# EAGLE board Hello (EAGLE 8.5.0)
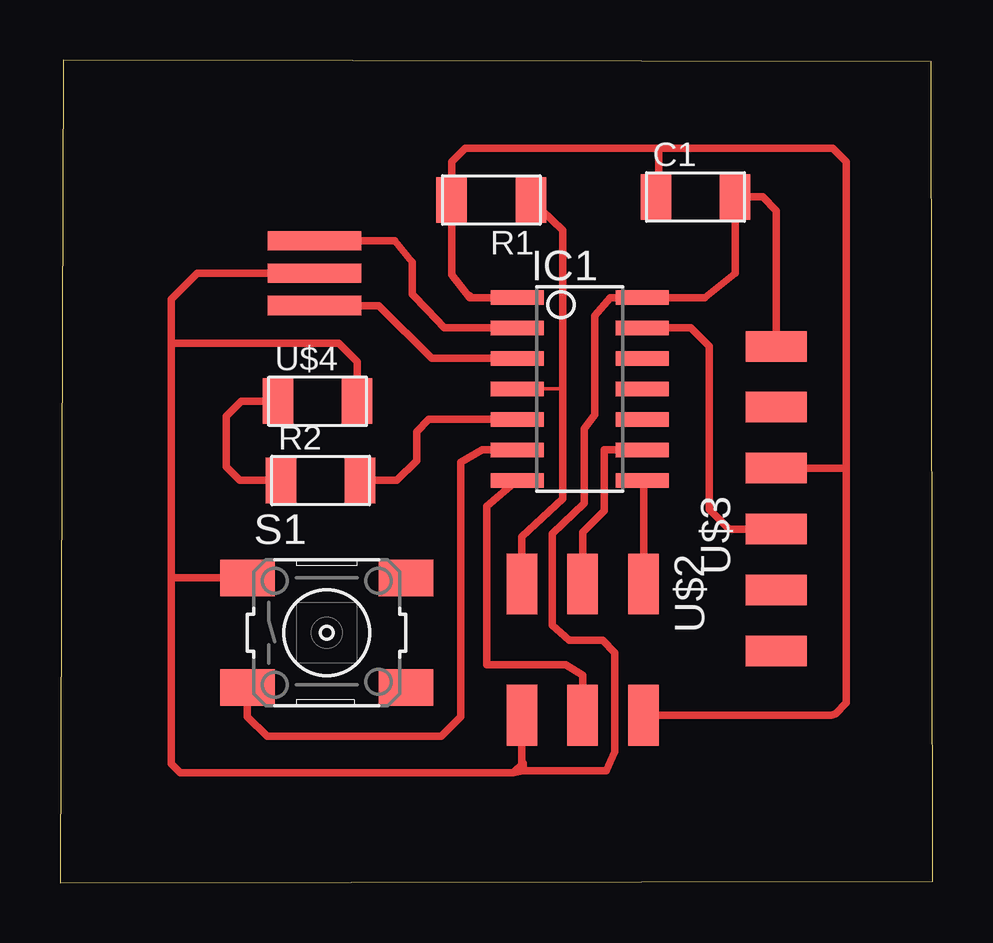
[diagram p0: board, top side]

Size 36.37 x 34.28 mm. Coordinates in mm from the lower left corner, seen from the top.
Outline: 0,0 36.37,0.06 36.31,34.22 0.13,34.28 0,0
Copper layers (1*16): Top 0.035mm / dielectric 1.5mm / Bottom 0.035mm
Design rules "default": minimum track width 6mil, minimum drill 0.35mm, track to track 6mil, track to pad 6mil, pad to pad 6mil, via to via 6mil, smd to smd 6mil, copper to edge 40mil, drill to drill 6mil, minimum pad ring 10mil, minimum via ring 8mil, stop-mask expansion 4mil, vias tented up to drill 0mil, thermal gap 10mil
Net classes: 0 default: clearance 0.205 mm

## Footprints (pad centres in the part's own frame; a part is rotated, then mirrored left to right if it is on the bottom)
C1206FAB = smd 1.27 x 1.905: 1 -1.651,0; 2 1.651,0
SOIC14 = smd 0.61 x 2.21: 1 -3.81,-2.603; 2 -2.54,-2.603; 3 -1.27,-2.603; 4 0,-2.603; 5 1.27,-2.603; 6 2.54,-2.603; 7 3.81,-2.603; 8 3.81,2.603; 9 2.54,2.603; 10 1.27,2.603; 11 0,2.603; 12 -1.27,2.603; 13 -2.54,2.603; 14 -3.81,2.603
R1206FAB = smd 1.27 x 1.905: 1 -1.651,0; 2 1.651,0
6MM_SWITCH = smd 2.286 x 1.524: 1 -3.302,2.286; 2 3.302,2.286; 3 -3.302,-2.286; 4 3.302,-2.286
EFOBM = smd 0.8 x 3.9: 1 -1.35,0; 2 0,0; 3 1.35,0
2X03SMD = smd 2.54 x 1.27: 1 -2.54,2.54; 2 2.92,2.54; 3 -2.54,0; 4 2.92,0; 5 -2.54,-2.54; 6 2.92,-2.54
1X06SMD = smd 2.54 x 1.27: 1 0,6.35; 2 0,3.81; 3 0,1.27; 4 0,-1.27; 5 0,-3.81; 6 0,-6.35
LED1206FAB = smd 1.27 x 1.905: 1 -1.651,0; 2 1.651,0

## Placement (x,y rotation side)
C1  CAP-US1206FAB  [C1206FAB]  26.48,28.57 0 top
IC1  ATTINY44-SSU  [SOIC14]  21.65,20.57 270 top
R1  [R1206FAB]  17.97,28.45 180 top
R2  [R1206FAB]  10.86,16.76 0 top
S1  [6MM_SWITCH]  11.11,10.41 0 top
U$1  RESONATOR  [EFOBM]  10.6,25.4 270 top
U$2  AVRISPSMD  [2X03SMD]  21.78,9.91 270 top
U$3  FTDI-SMD-HEADER  [1X06SMD]  29.84,16 0 top
U$4  LEDFAB1206  [LED1206FAB]  10.73,20.07 0 top

## Library data of the parts
C1 IC1 R1 R2 S1 U$1-U$4 = fab

## Nets
GND: C1.2 IC1.14 S1.1 U$1.2 U$2.6 U$3.1 U$4.2
MISO: IC1.8 U$2.1
MOSI: IC1.7 U$2.4
N$1: IC1.2 U$1.1
N$2: IC1.3 U$1.3
N$3: R2.1 U$4.1
N$4: IC1.6 S1.3
N$5: IC1.5 R2.2
N$7: U$3.5
PA0: IC1.13 U$3.4
PA1: IC1.12
RST: IC1.4 R1.1 U$2.5
SCK: IC1.9 U$2.3
VCC: C1.1 IC1.1 R1.2 U$2.2 U$3.3

## Tracks (layer width: path | path; a pad name or v marks a point on that pad's centre or on a via)
GND
  Top 0.305: U$3.1 29.84,28 29.27,28.57 C1.2 28.13,25.4 26.86,24.38 IC1.14 22.92,24.38 22.29,23.62 22.29,19.49 21.84,18.92 21.84,15.81 20.51,14.54 20.51,10.73 21.21,10.1 22.61,10.1 23.11,9.59 23.11,5.46 22.76,4.66 19.3,4.66 | U$2.6 19.24,4.92 19.3,4.66 | U$1.2 5.71,25.4 4.64,24.32 4.64,22.48 | 4.64,22.48 4.64,12.7 | 4.64,12.7 4.64,4.95 4.94,4.64 5.02,4.58 18.88,4.58 | 18.88,4.58 19.3,4.66 | S1.1 4.64,12.7 | U$4.2 12.38,21.72 11.62,22.48 4.64,22.48 | 19.3,4.66 19.3,4.98 18.88,4.58
MISO
  Top 0.305: U$2.1 24.32,16.7 IC1.8
MOSI
  Top 0.305: U$2.4 21.78,8.64 21.08,9.08 17.78,9.08 17.78,15.68 IC1.7
N$1
  Top 0.305: U$1.1 13.95,26.75 14.67,25.84 14.67,24.51 15.3,23.88 16,23.11 IC1.2
N$2
  Top 0.305: U$1.3 13.29,24.05 15.49,21.84 IC1.3
N$3
  Top 0.305: U$4.1 7.56,20.07 6.92,19.43 6.92,17.34 7.49,16.76 R2.1
N$4
  Top 0.305: S1.3 7.81,6.92 8.64,6.1 15.88,6.1 16.7,6.92 16.7,17.53 17.59,18.03 IC1.6
N$5
  Top 0.305: R2.2 14.03,16.76 14.86,17.59 14.86,18.8 15.37,19.3 IC1.5
PA0
  Top 0.305: IC1.13 26.29,23.11 27.05,22.35 27.05,15.56 27.88,14.73 U$3.4
RST
  Top 0.152: IC1.4 20.89,20.57 20.95,21.02
  Top 0.305: U$2.5 19.24,14.41 20.95,16 20.95,21.02 20.95,27.18 R1.1
SCK
  Top 0.305: U$2.3 21.78,14.61 22.67,15.49 22.67,18.03 IC1.9
VCC
  Top 0.305: U$3.3 32.77,17.27 | 32.77,17.27 32.77,7.49 32.32,7.05 32.13,6.99 U$2.2 | IC1.1 17.14,24.38 17.08,24.45 17.08,24.38 16.32,25.34 R1.2 16.32,30.04 16.89,30.61 24.96,30.61 | 24.96,30.61 32.19,30.61 32.77,30.04 32.77,17.27 | 24.89,28.64 C1.1 24.96,28.7 24.96,30.61